# EAGLE board STM32F103C8T6-breakout-board_compact (EAGLE 9.4.2)
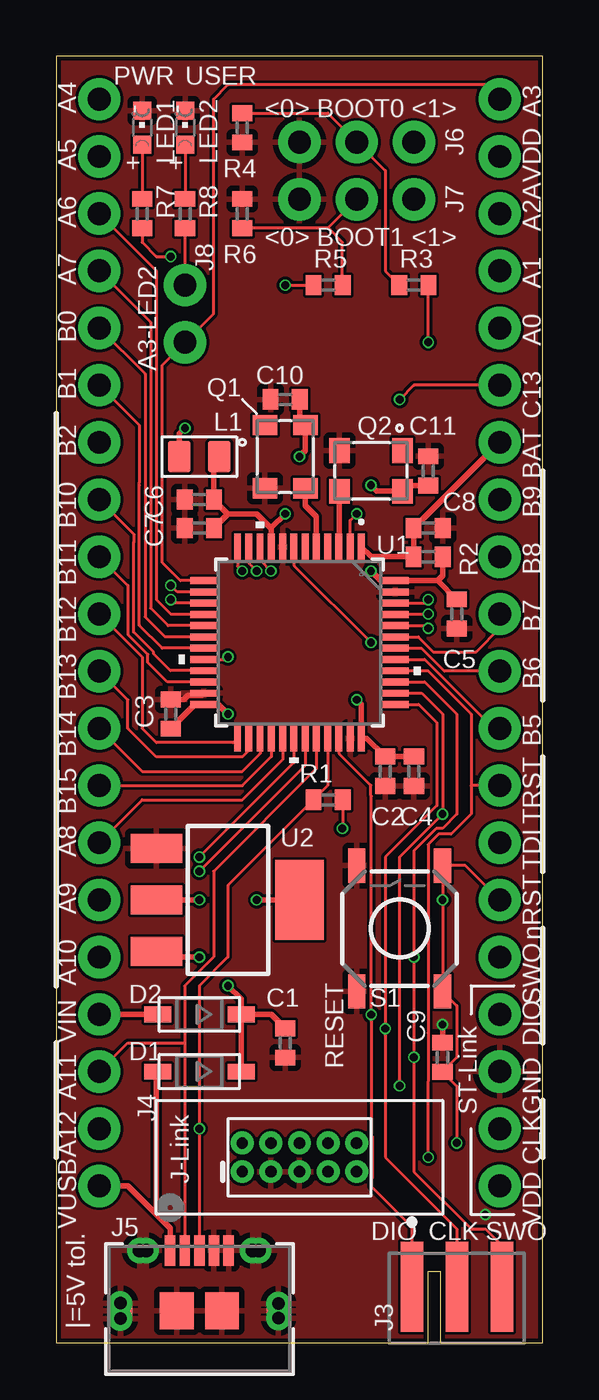
[diagram p0: board, top side]
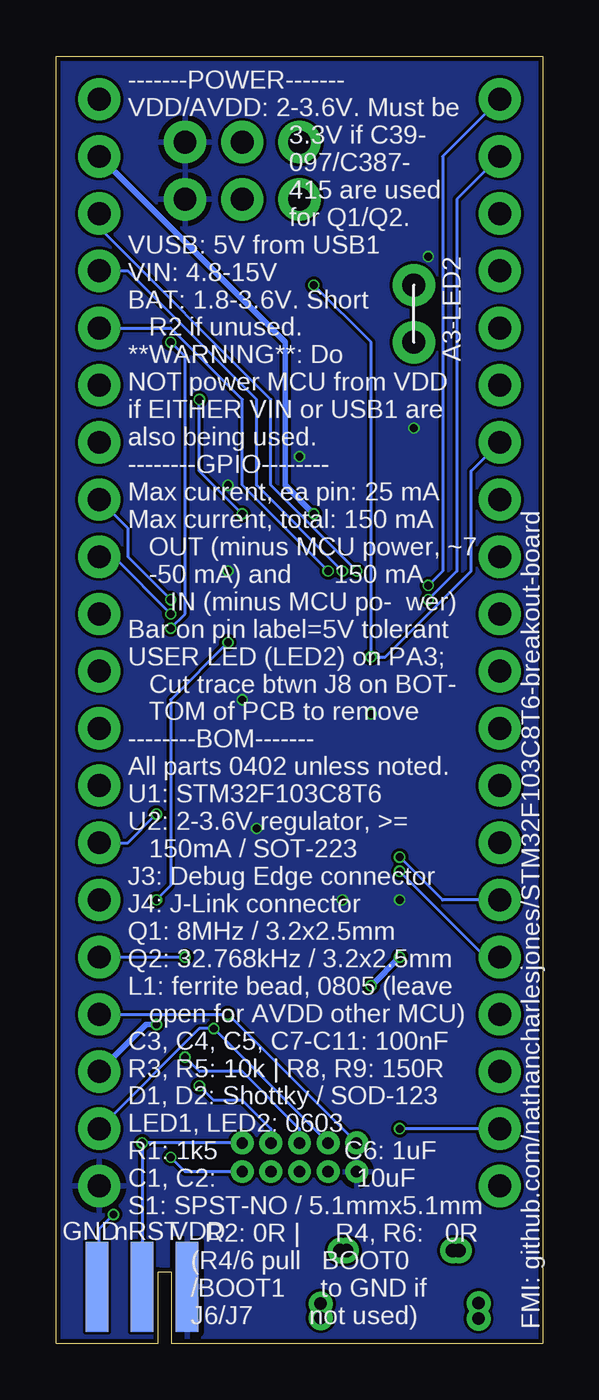
[diagram p1: board, bottom side, seen from below]

Size 21.59 x 57.15 mm. Coordinates in mm from the lower left corner, seen from the top.
Outline: 21.59,0 21.59,57.15 0,57.15 0,0 16.48,0 16.48,3.17 17.07,3.17 17.07,0 21.59,0
Copper layers (1*16): Top 0.035mm / dielectric 1.6mm / Bottom 0.035mm
Design rules "jlcpcb-2layers": minimum track width 5mil, minimum drill 0.3mm, track to track 5mil, track to pad 5mil, pad to pad 5mil, via to via 5mil, smd to smd 5mil, copper to edge 0.2mm, drill to drill 6mil, minimum pad ring 10mil, minimum via ring 3mil, stop-mask expansion 4mil, vias tented up to drill 0mil, thermal gap 10mil

## Footprints (pad centres in the part's own frame; a part is rotated, then mirrored left to right if it is on the bottom)
C0402 = smd 0.7 x 0.9: 1 -0.65,0; 2 0.65,0
SOD-123 = smd 1.2 x 0.7: A 1.85,0; C -1.85,0
1X20_NOSILK = drill 1.016 pad 1.88: 1 0,0; 2 2.54,0; 3 5.08,0; 4 7.62,0; 5 10.16,0; 6 12.7,0; 7 15.24,0; 8 17.78,0; 9 20.32,0; 10 22.86,0; 11 25.4,0; 12 27.94,0; 13 30.48,0; 14 33.02,0; 15 35.56,0; 16 38.1,0; 17 40.64,0; 18 43.18,0; 19 45.72,0; 20 48.26,0
AVX_6-PIN_009159006061916_0 = smd 1 x 4: 1 -2,2.5; 2 0,2.5; 3 2,2.5 | smd 1 x 4 bottom: 4 -2,2.5; 5 0,2.5; 6 2,2.5
2X5-PTH-1.27MM = drill 0.508 pad 1: 1 -2.54,-0.635; 2 -2.54,0.635; 3 -1.27,-0.635; 4 -1.27,0.635; 5 0,-0.635; 6 0,0.635; 7 1.27,-0.635; 8 1.27,0.635; 9 2.54,-0.635; 10 2.54,0.635
CONN_10118194-0001LF_AMP = smd 0.457 x 1.346: 1 -1.3,2.594; 2 -0.65,2.594; 3 0,2.594; 4 0.65,2.594; 5 1.3,2.594 | smd 1.499 x 1.651: 10 -1,-0.081; 11 1,-0.081 | smd 1.016 x 1.702: S_1 -3.5,-0.081 | drill 0.559 pad 0.559: S_1_H1 -3.505,0.254; S_1_H2 -3.505,-0.432; S_2_H1 3.505,0.229; S_2_H2 3.505,-0.406 | smd 1.016 x 1.651: S_2 3.5,-0.081 | smd 1.295 x 1.016: S_3 -2.5,2.594; S_4 2.5,2.594 | drill 0.61 pad 0.61: S_3_H1 -2.362,2.591; S_3_H2 -2.642,2.591; S_4_H1 2.642,2.591; S_4_H2 2.362,2.591
1X03_NO_SILK = drill 1.016 pad 1.88: 1 0,0; 2 2.54,0; 3 5.08,0
1X02_NO_SILK = drill 1.016 pad 1.88: 1 0,0; 2 2.54,0
L0805 = smd 1.016 x 1.397: 1 -0.889,0; 2 0.889,0
CHIPLED_0603 = smd 0.8 x 0.8: A 0,-0.75; C 0,0.75
3.2X2.5_KXO-84-TCXO = smd 0.9 x 1.1: 1 -1.4,-0.9; 2 1.4,-0.9; 3 1.4,0.9; 4 -1.4,0.9
R0402 = smd 0.7 x 0.9: 1 -0.65,0; 2 0.65,0
TACTILE_SWITCH_SMD_5.2MM = smd 1.524 x 0.762: 1 -2.794,1.905; 2 2.794,1.905; 3 -2.794,-1.905; 4 2.794,-1.905
LQFP48-7X7MM = smd 1.194 x 0.305: 1 -4.25,2.75; 2 -4.25,2.25; 3 -4.25,1.75; 4 -4.25,1.25; 5 -4.25,0.75; 6 -4.25,0.25; 7 -4.25,-0.25; 8 -4.25,-0.75; 9 -4.25,-1.25; 10 -4.25,-1.75; 11 -4.25,-2.25; 12 -4.25,-2.75; 25 4.25,-2.75; 26 4.25,-2.25; 27 4.25,-1.75; 28 4.25,-1.25; 29 4.25,-0.75; 30 4.25,-0.25; 31 4.25,0.25; 32 4.25,0.75; 33 4.25,1.25; 34 4.25,1.75; 35 4.25,2.25; 36 4.25,2.75 | smd 0.305 x 1.194: 13 -2.75,-4.25; 14 -2.25,-4.25; 15 -1.75,-4.25; 16 -1.25,-4.25; 17 -0.75,-4.25; 18 -0.25,-4.25; 19 0.25,-4.25; 20 0.75,-4.25; 21 1.25,-4.25; 22 1.75,-4.25; 23 2.25,-4.25; 24 2.75,-4.25; 37 2.75,4.25; 38 2.25,4.25; 39 1.75,4.25; 40 1.25,4.25; 41 0.75,4.25; 42 0.25,4.25; 43 -0.25,4.25; 44 -0.75,4.25; 45 -1.25,4.25; 46 -1.75,4.25; 47 -2.25,4.25; 48 -2.75,4.25
SOT-223 = smd 1.27 x 2.286: 1 -2.286,-3.175; 2 0,-3.175; 3 2.286,-3.175 | smd 3.556 x 2.159: TER 0,3.175

## Placement (x,y rotation side)
C1  10uF  [C0402]  10.16,13.34 270 top
C2  10uF  [C0402]  14.61,25.4 270 top
C3  100nF  [C0402]  5.08,27.94 90 top
C4  100nF  [C0402]  15.88,25.4 270 top
C5  100nF  [C0402]  17.78,32.38 270 top
C6  1uF  [C0402]  6.35,37.47 180 top
C7  100nF  [C0402]  6.35,36.2 180 top
C8  100nF  [C0402]  16.51,36.2 0 top
C9  100nF  [C0402]  17.14,12.7 90 top
C10  100nF  [C0402]  10.16,41.91 180 top
C11  100nF  [C0402]  16.51,38.73 90 top
D1  [SOD-123]  6.35,12.06 180 top
D2  [SOD-123]  6.35,14.61 180 top
FRAME2  FRAME-LETTERNO_PACKAGE  [DUMMY]  -10.79,0 0 top  (outside the outline)
J1  [1X20_NOSILK]  1.91,55.24 270 top
J2  [1X20_NOSILK]  19.68,55.24 270 top
J3  AVX_6-PIN_009159006061916  [AVX_6-PIN_009159006061916_0]  17.78,0 0 top
J4  CORTEX_DEBUG_PTH  [2X5-PTH-1.27MM]  10.79,8.26 0 top
J5  10118194-0001LF  [CONN_10118194-0001LF_AMP]  6.35,1.52 0 top
J6  [1X03_NO_SILK]  10.79,53.34 0 top
J7  [1X03_NO_SILK]  10.79,50.8 0 top
J8  [1X02_NO_SILK]  5.71,44.45 90 top
L1  470R-2A  [L0805]  6.35,39.37 180 top
LED1  [CHIPLED_0603]  3.81,53.98 0 top
LED2  [CHIPLED_0603]  5.71,53.98 0 top
Q1  [3.2X2.5_KXO-84-TCXO]  10.16,39.37 270 top
Q2  [3.2X2.5_KXO-84-TCXO]  13.97,38.73 180 top
R1  1k5  [R0402]  12.06,24.13 0 top
R2  0R  [R0402]  16.51,34.92 0 top
R3  10k  [R0402]  15.88,46.99 0 top
R4  0R  [R0402]  8.26,53.98 90 top
R5  10k  [R0402]  12.06,46.99 180 top
R6  0R  [R0402]  8.26,50.16 270 top
R7  150R  [R0402]  3.81,50.16 270 top
R8  150R  [R0402]  5.71,50.16 90 top
S1  MOMENTARY-SWITCH-SPST-SMD-5.2-REDUNDANT  [TACTILE_SWITCH_SMD_5.2MM]  15.24,18.41 90 top
U1  STM32F103C8T6  [LQFP48-7X7MM]  10.79,31.11 270 top
U2  CJT1117-3.3-SOT223  [SOT-223]  7.62,19.68 270 top

## Library data of the parts
C1 C2 = adafruit; LCSC_PART: C15525
C3-C5 C7-C11 = adafruit; LCSC_PART: C1525
C6 = adafruit; LCSC_PART: C52923
D1 D2 = adafruit; LCSC_PART: C8598
FRAME2 = SparkFun-Aesthetics; DESIGNER: Nathan Jones; VERSION: v01
J1 J2 J4 J6-J8 = SparkFun-Connectors
J3 = Debug-Edge_AVX-connectors
J5 = USB-micro-B_Amphenol_10118194-0001LF; BUILT_BY: EMA_Cory; COPYRIGHT: Copyright (C) 2018 Accelerated Designs. All rights reserved; DATASHEET: https://www.amphenol-icc.com/media/wysiwyg/files/drawing/10118194.pdf; MANUFACTURER_PART_NUMBER: 10118194-0001LF; SOURCELIBRARY: Amphenol_ICC_2020-04-09; VENDOR: Amphenol
L1 = OPL_Ferrite_and_Magnetic_Bead; LCSC_PART: C1015; MPN: WLB2012-471T20
LED1 = adafruit; LCSC_PART: C72041
LED2 = adafruit; LCSC_PART: C72038
Q1 = crystal-geyer_V1_0; LCSC_PART: C39097
Q2 = crystal-geyer_V1_0; LCSC_PART: C387415
R1 = adafruit; LCSC_PART: C25867
R2 R4 R6 = adafruit; LCSC_PART: C17168
R3 R5 = adafruit; LCSC_PART: C25744
R7 R8 = adafruit; LCSC_PART: C25082
S1 = SparkFun-Switches; LCSC_PART: C318884; PROD_ID: SWCH-08247; SF_SKU: COM-08720
U1 = STM32F103C8T6; BUILT_BY: EMA_UL_Team; COPYRIGHT: Copyright (C) 2018 Accelerated Designs. All rights reserved; LCSC_PART: C94046; MANUFACTURER_PART_NUMBER: STM32F103C8T6; SOURCELIBRARY: Updates_to_database_2020-10-19; VENDOR: STMicroelectronics
U2 = OPL_IC; LCSC_PART: C6186; MPN: CJT1117-3.3

## Nets
AVDD: C6.1 C7.1 J2.2 L1.1 U1.9
BOOT0: R3.2 U1.44
BOOT1*: J1.7 R5.2 U1.20
GND: C1.2 C2.2 C3.2 C4.2 C5.2 C6.2 C7.2 C8.2 C9.2 C10.2 C11.2 J2.18 J3.6 J4.3 J4.5 J5.4 J5.5 J5.10 J5.11 J5.S_1 J5.S_1_H1 J5.S_1_H2 J5.S_2 J5.S_2_H1 J5.S_2_H2 J5.S_3 J5.S_3_H1 J5.S_3_H2 J5.S_4 J5.S_4_H1 J5.S_4_H2 J6.1 J7.1 LED1.C LED2.C Q1.2 Q2.2 R4.1 R6.1 S1.1 S1.2 U1.8 U1.23 U1.35 U1.47 U2.1
JTDI*: J2.14 J4.8 U1.38
JTRST*: J2.13 J4.9 U1.40
N$1: J6.2 R3.1 R4.2
N$4: LED2.A R8.2
N$6: J7.2 R5.1 R6.2
N$7: LED1.A R7.1
NRST: C9.1 J2.15 J3.5 J4.10 S1.3 S1.4 U1.7
OSC32_IN: Q2.3 U1.3
OSC32_OUT: U1.4
OSC_IN: Q1.3 U1.5
OSC_OUT: U1.6
PA0: J2.5 U1.10
PA1: J2.4 U1.11
PA2: J2.3 U1.12
PA3: J2.1 J8.1 J8.2 R8.1 U1.13
PA4: J1.1 U1.14
PA5: J1.2 U1.15
PA6: J1.3 U1.16
PA7: J1.4 U1.17
PA8*: J1.14 U1.29
PA9*: J1.15 U1.30
PA10*: J1.16 U1.31
PB0: J1.5 U1.18
PB1: J1.6 U1.19
PB5: J2.12 U1.41
PB6*: J2.11 U1.42
PB7*: J2.10 U1.43
PB8*: J2.9 U1.45
PB9*: J2.8 U1.46
PB10*: J1.8 U1.21
PB11*: J1.9 U1.22
PB12*: J1.10 U1.25
PB13*: J1.11 U1.26
PB14*: J1.12 U1.27
PB15*: J1.13 U1.28
PC13: J2.6 U1.2
SWCLK*: J2.19 J3.2 J4.4 U1.37
SWDIO*: J2.17 J3.1 J4.2 U1.34
SWO*: J2.16 J3.3 J4.6 U1.39
USB_DM*: J1.18 J5.2 U1.32
USB_DP*: J1.19 J5.3 R1.1 U1.33
VBAT_1.8-3.6V: C8.1 J2.7 R2.1 U1.1
VDD: C2.1 C3.1 C4.1 C5.1 C10.1 C11.1 J2.20 J3.4 J4.1 J6.3 J7.3 L1.2 Q1.4 Q2.4 R1.2 R2.2 R7.2 U1.24 U1.36 U1.48 U2.2 U2.TER
VIN: C1.1 D1.C D2.C U2.3
VIN_4.8-15V: D2.A J1.17
VUSB: D1.A J1.20 J5.1

## Tracks (layer width: path | path; a pad name or v marks a point on that pad's centre or on a via)
AVDD  (via drill 0.35)
  Top 0.254: 9.54,36.17 8.89,36.83 7.62,36.83 | 7.62,36.83 7,37.45 C6.1 7,39.13 L1.1 | C7.1 7.62,36.83 | 9.54,36.17 9.54,36.22 v10.16,36.83 | 9.54,36.17 U1.9
  Bottom 0.254: v10.16,36.83 11.43,38.1 11.43,44.45 J2.2
BOOT0  (via drill 0.35)
  Top 0.127: U1.44 16.39,31.86 v16.51,31.75 | R3.2 16.51,46.98 v16.51,44.45
  Bottom 0.127: v16.51,31.75 15.88,32.38 15.88,43.81 v16.51,44.45
BOOT1*  (via drill 0.35)
  Top 0.127: U1.20 7.5,30.36 v7.62,30.48 | v10.16,46.99 R5.2
  Bottom 0.127: J1.7 3.17,38.73 3.17,34.29 6.99,30.48 v7.62,30.48 7.62,44.45 v10.16,46.99
GND  (via drill 0.35)
  Top 0.254: U1.23 6.45,28.77 5.84,28.77 5.66,28.59 C3.2 | C9.2 v17.14,14.15
  Bottom 0.127: J3.6 19.68,2.6 19.68,5.08 v19.05,5.71
  Bottom 0.254: v17.14,14.15 17.6,14.15 J2.18
  pour Top: 0,57.15 21.59,57.15 21.59,0 0,0
JTDI*  (via drill 0.35)
  Top 0.127: U1.38 16.22,28.86 17.14,27.94 v17.14,23.5 15.24,21.59 v15.24,11.43
  Bottom 0.127: J4.8 12.06,9.53 13.34,10.79 14.61,10.79 v15.24,11.43 | v17.14,23.5 18.41,22.23 J2.14
JTRST*  (via drill 0.35)
  Top 0.127: U1.40 16.49,29.86 18.41,27.94 18.41,24.77 | 18.41,24.77 18.41,23.5 17.53,22.61 16.97,22.61 16.51,22.14 16.51,13.78 16.5,13.78 16.5,11.62 16.51,11.62 v16.51,8.26 | J2.13 18.41,24.77
  Bottom 0.127: J4.9 15.88,7.62 v16.51,8.26
N$1
  Top 0.127: R4.2 12.05,54.62 J6.2 14.61,52.07 14.61,47.61 R3.1
N$4
  Top 0.127: LED2.A R8.2
N$6
  Top 0.127: R5.1 12.7,47.01 12.7,48.9 12.06,49.53 | J7.2 12.06,49.53 | R6.2 12.06,49.53
N$7
  Top 0.127: LED1.A R7.1
NRST  (via drill 0.35)
  Top 0.127: U1.7 10.54,34.54 v13.97,31.11 | v17.78,8.89 17.78,11.41 C9.1 17.78,12.69 17.78,12.92 17.79,12.92 17.79,14.98 S1.3 v17.14,19.68 S1.4 18.16,21.21 J2.15
  Bottom 0.127: J4.10 v17.78,8.89 J3.5 | v13.97,31.11 16.51,28.57 16.51,20.32 v17.14,19.68
OSC32_IN
  Top 0.254: Q2.3 12.57,35.39 U1.3
OSC_IN
  Top 0.254: U1.5 11.54,36.72 11.06,37.2 Q1.3
PA0  (via drill 0.35)
  Top 0.127: U1.10 9.04,34.77 v9.53,34.29
  Bottom 0.127: v9.53,34.29 13.34,38.1 13.34,41.91 16.51,45.09 J2.5
PA1  (via drill 0.35)
  Top 0.127: U1.11 8.54,34.63 v8.89,34.29
  Bottom 0.127: v8.89,34.29 12.7,38.1 12.7,41.91 18.41,47.62 J2.4
PA2  (via drill 0.35)
  Top 0.127: U1.12 8.04,34.5 v8.26,34.29
  Bottom 0.127: v8.26,34.29 12.06,38.1 12.06,41.91 19.68,49.53 J2.3
PA3
  Top 0.127: J8.2 R8.1 | U1.13 5.5,33.87 4.7,34.67 4.7,43.43 J8.1 6.99,45.72 6.99,55.24 7.62,55.88 19.05,55.88 J2.1
  Bottom 0.127: J8.1 J8.2
PA4  (via drill 0.35)
  Top 0.127: U1.14 5.37,33.37 v5.08,33.66
  Bottom 0.127: v5.08,33.66 4.45,34.29 4.45,52.7 J1.1
PA5  (via drill 0.35)
  Top 0.127: U1.15 5.24,32.87 v5.08,33.02
  Bottom 0.127: v5.08,33.02 3.81,34.29 3.81,50.8 J1.2
PA6
  Top 0.127: U1.16 5.1,32.37 4.45,33.02 4.45,47.62 J1.3
PA7
  Top 0.127: U1.17 4.96,31.86 4.19,32.64 4.19,45.34 J1.4
PA8*
  Top 0.127: U1.29 10.04,25.92 8.26,24.13 3.81,24.13 J1.14
PA9*  (via drill 0.35)
  Top 0.127: U1.30 10.54,25.79 v6.35,21.59
  Bottom 0.127: v6.35,21.59 4.45,19.68 J1.15
PA10*  (via drill 0.35)
  Top 0.127: U1.31 11.04,25.65 v6.35,20.95
  Bottom 0.127: v6.35,20.95 2.54,17.14 J1.16
PB0
  Top 0.127: U1.18 4.83,31.36 3.94,32.26 3.94,43.05 J1.5
PB1
  Top 0.127: U1.19 4.7,30.86 3.68,31.88 3.68,38.1 3.68,38.23 3.68,40.77 J1.6
PB5
  Top 0.127: U1.41 16.35,30.36 19.41,27.3 J2.12
PB6*
  Top 0.127: U1.42 16.21,30.86 17.19,29.89 17.23,29.84 J2.11
PB7*
  Top 0.127: U1.43 16.07,31.36 16.73,30.7 18.64,30.7 19.68,31.75 J2.10
PB8*  (via drill 0.35)
  Top 0.127: U1.45 15.06,32.38 v16.51,32.38
  Bottom 0.127: v16.51,32.38 19.05,34.92 J2.9
PB9*  (via drill 0.35)
  Top 0.127: U1.46 16.36,32.87 v16.51,33.02
  Bottom 0.127: v16.51,33.02 18.41,34.92 18.41,36.2 J2.8
PB10*
  Top 0.127: U1.21 5.06,29.86 4.32,30.61 4.32,30.69 3.43,31.58 3.43,35.56 3.43,35.94 J1.8
PB11*
  Top 0.127: U1.22 4.92,29.36 4.06,30.23 4.06,30.59 3.17,31.47 3.17,33.66 J1.9
PB12*
  Top 0.127: U1.25 7.85,26.67 4.45,26.67 3.81,27.3 3.81,30.48 J1.10
PB13*
  Top 0.127: U1.26 8.54,26.32 8.26,26.04 4.45,26.04 3.17,27.3 3.17,28.57 J1.11
PB14*
  Top 0.127: U1.27 9.04,26.19 8.26,25.4 3.81,25.4 J1.12
PB15*
  Top 0.127: U1.28 9.54,26.05 8.26,24.77 J1.13
PC13  (via drill 0.35)
  Top 0.127: U1.2 13.04,36.54 v13.34,36.83 | v15.24,41.91 15.88,42.55 J2.6
  Bottom 0.127: v13.34,36.83 15.24,38.73 v15.24,41.91
SWCLK*  (via drill 0.35)
  Top 0.127: U1.37 16.09,28.36 16.89,27.56 16.89,23.88 14.61,21.59 v14.61,13.97 14.61,8.26 17.78,5.08 J3.2
  Bottom 0.127: J4.4 v14.61,13.97 15.24,13.97 J2.19
SWDIO*  (via drill 0.35)
  Top 0.127: U1.34 12.54,26.19 13.96,24.77 13.96,24.32 13.98,24.3 v13.98,14.59 13.98,9.23 14.03,9.18 14.03,7.33 13.98,7.28 13.98,6.97 15.78,5.17 J3.1
  Bottom 0.127: J4.2 13.96,14.59 v13.98,14.59 J2.17
SWO*  (via drill 0.35)
  Top 0.127: U1.39 16.36,29.36 17.78,27.94 17.78,23.5 17.14,22.86 16.87,22.86 15.88,21.87 v15.88,17.14 v15.88,12.7 15.88,7.62 18.41,5.08 19.05,5.08 19.78,4.35 J3.3
  Bottom 0.127: J4.6 10.79,9.53 13.34,12.06 15.24,12.06 v15.88,12.7 | J2.16 v15.88,17.14
USB_DM*
  Top 0.127: U1.32 11.54,25.52 6.99,20.95 6.99,17.14 5.7,15.86 5.7,13.34 | 5.7,13.34 J5.2 | 5.7,13.34 3.17,13.34 J1.18
USB_DP*  (via drill 0.35)
  Top 0.127: U1.33 12.04,24.76 R1.1 7.62,20.34 7.62,17.14 6.35,15.88 v6.35,9.53 J5.3
  Bottom 0.127: J1.19 v6.35,9.53
VBAT_1.8-3.6V
  Top 0.254: U1.1 13.98,34.92 R2.1 C8.1 J2.7
VDD  (via drill 0.35)
  Top 0.127: R1.2 12.71,22.88 v12.7,22.86 | R7.2 3.81,48.9 4.45,48.26 v5.08,48.26
  Top 0.254: C11.1 15.62,38.09 Q2.4 14.23,37.84 v13.97,38.1 | v13.97,34.29 14.39,33.87 U1.48 16.93,33.87 | C4.1 C2.1 13.79,26.86 U1.36 13.54,28.36 v13.34,28.57 | v7.62,27.94 7.2,28.36 U1.24 6.16,28.36 C3.1 | U2.2 v6.35,19.68 | U2.TER v8.89,19.68 | C5.1 17.77,33.03 16.93,33.87 | R2.2 17.16,34.09 16.93,33.87 | L1.2 5.46,40.39 v5.71,40.64 | C10.1 10.81,41.02 Q1.4 11.06,39.63 v10.79,39.37
  pour Bottom: 0,57.15 21.59,57.15 21.59,0 0,0
VIN  (via drill 0.35)
  Top 0.254: D2.C D1.C | D2.C 9.54,14.61 C1.1 | D2.C 8.2,15.29 v7.62,15.88 | v6.35,17.14 4.7,17.14 U2.3
  Bottom 0.254: v7.62,15.88 v6.35,17.14
VIN_4.8-15V
  Top 0.254: J1.17 D2.A
VUSB
  Top 0.254: J5.1 5.05,5.11 4.45,5.71 | 4.45,5.71 4.45,12.01 D1.A | J1.20 3.17,6.99 4.45,5.71

## Text on the board
tPlace: ST-Link
tNames: PWR | USER | A3 | A4 | <0> BOOT0 <1> | AVDD | A5 | + - | + - | A2 | A6 | <0> BOOT1 <1> | A1 | A7 | A0 | B0 | A3-LED2 | C13 | B1 | BAT | B2 | B9 | B10 | B8 | B11 | B7 | B12 | B6 | B13 | B5 | B14 | TRST | B15 | TDI | A8 | nRST | A9 | SWO | A10 | RESET | DIO | VIN | GND | A11 | J-Link | CLK | A12 | VDD | VUSB | DIO | CLK | SWO | |=5V tol.
bNames: -------POWER------- / VDD/AVDD: 2-3.6V. Must be / 3.3V if C39- / 097/C387- / 415 are used / for Q1/Q2. / VUSB: 5V from USB1 / VIN: 4.8-15V / BAT: 1.8-3.6V. Short / R2 if unused. / **WARNING**: Do / NOT power MCU from VDD / if EITHER VIN or USB1 are / also being used. / --------GPIO-------- / Max current, ea pin: 25 mA / Max current, total: 150 mA / OUT (minus MCU power, ~7 / -50 mA) and 150 mA / IN (minus MCU po- wer) / Bar on pin label=5V tolerant / USER LED (LED2) on PA3; / Cut trace btwn J8 on BOT- / TOM of PCB to remove / --------BOM------- / All parts 0402 unless noted. / U1: STM32F103C8T6 / U2: 2-3.6V regulator, >= / 150mA / SOT-223 / J3: Debug Edge connector / J4: J-Link connector / Q1: 8MHz / 3.2x2.5mm / Q2: 32.768kHz / 3.2x2.5mm / L1: ferrite bead, 0805 (leave / open for AVDD other MCU) / C3, C4, C5, C7-C11: 100nF / R3, R5: 10k | R8, R9: 150R / D1, D2: Shottky / SOD-123 / LED1, LED2: 0603 / R1: 1k5 C6: 1uF / C1, C2: 10uF / S1: SPST-NO / 5.1mmx5.1mm / R2: 0R | R4, R6: 0R / (R4/6 pull BOOT0 / /BOOT1 to GND if / J6/J7 not used) | A3-LED2 | VDD | nRST | GND | FMI: github.com/nathancharlesjones/STM32F103C8T6-breakout-board